# Altium PCB Remote.PcbDoc
Units mm, origin at the board's own origin, x right, y up, seen from the top; angles counter-clockwise.
Board outline 120 x 80 mm, 2 copper layers (TL, BL), stack 0.872 mm thick; 54 components, 45 nets, 207 pads, 348 vias.
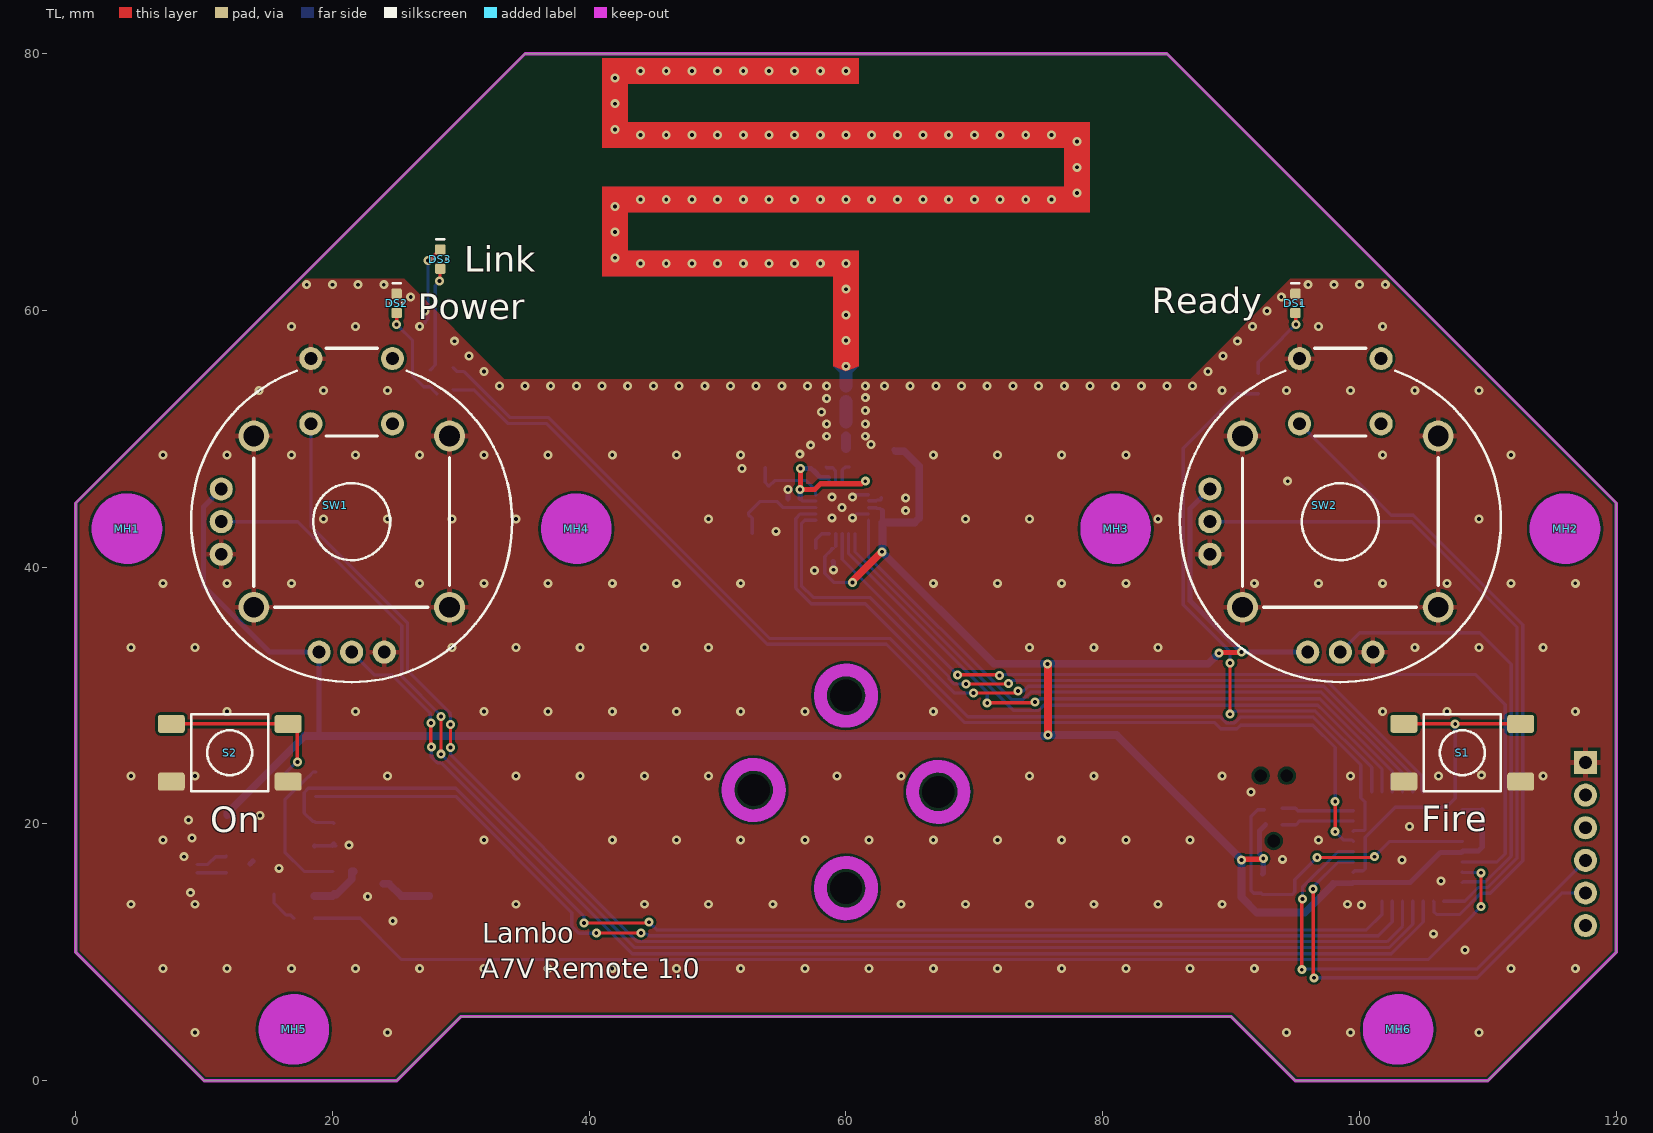
[diagram p0: TL view]
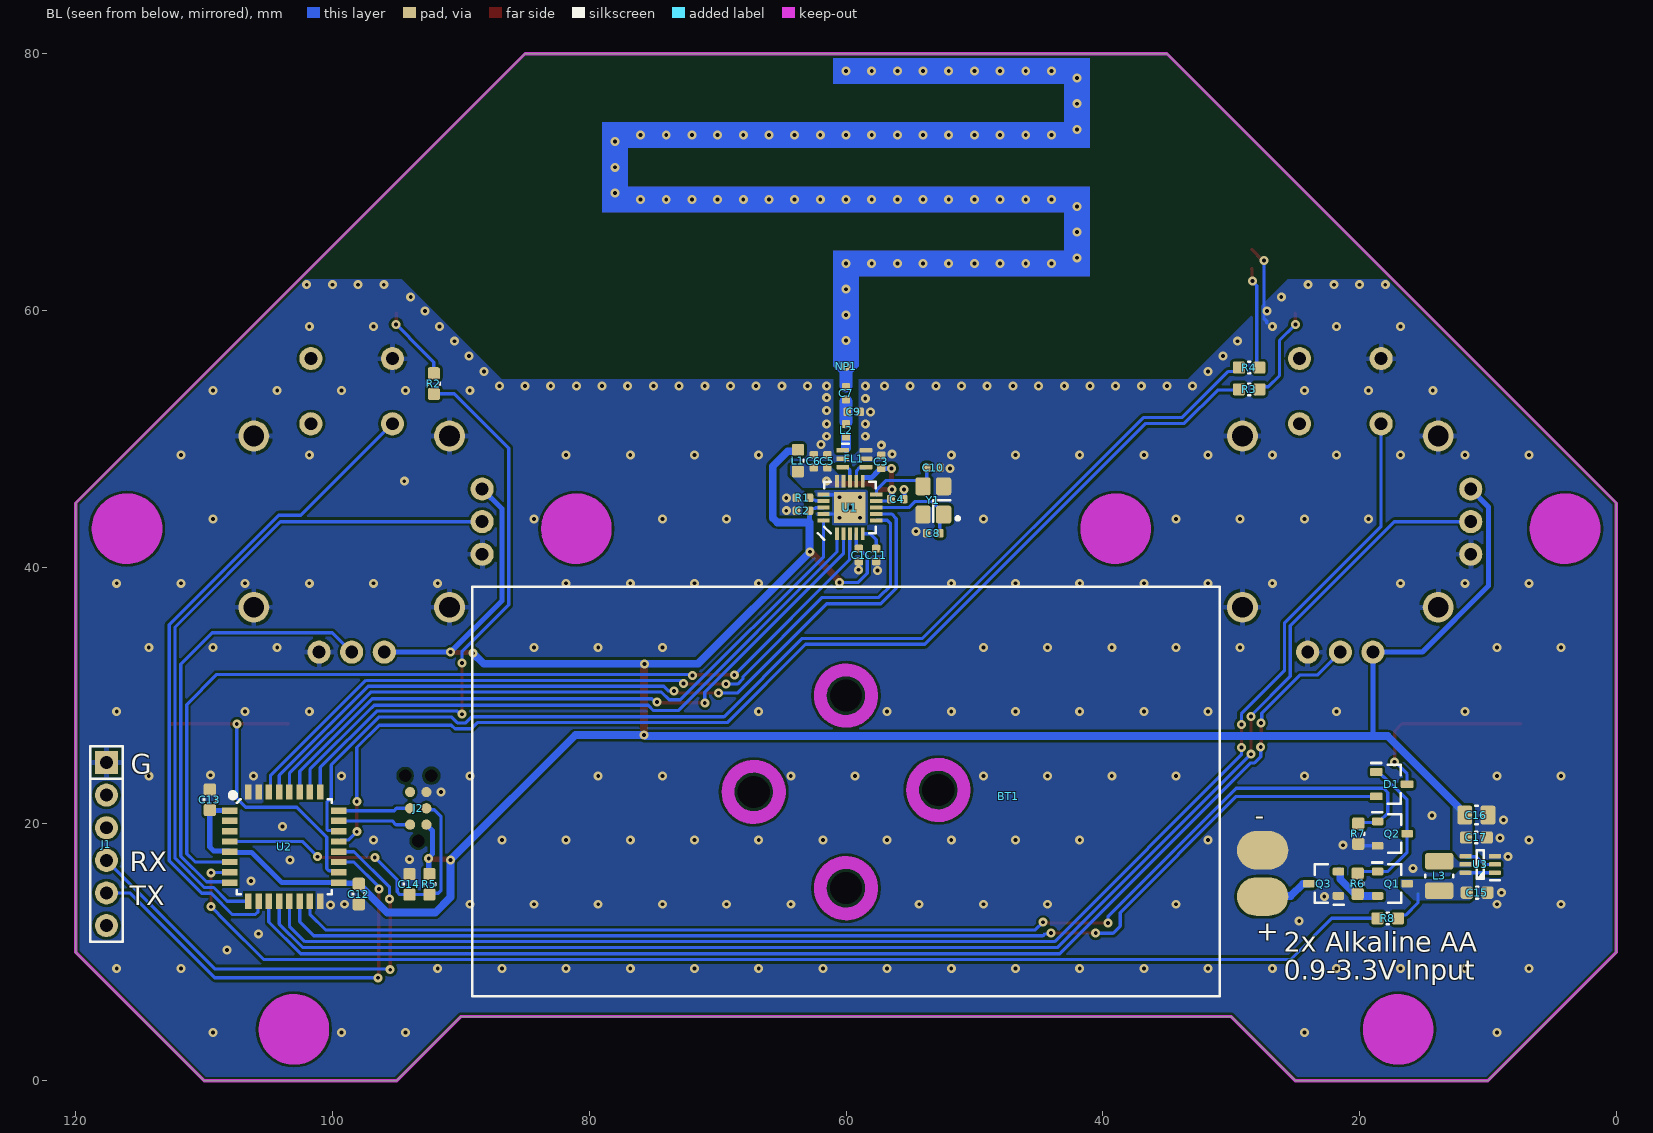
[diagram p1: BL view, seen from below]
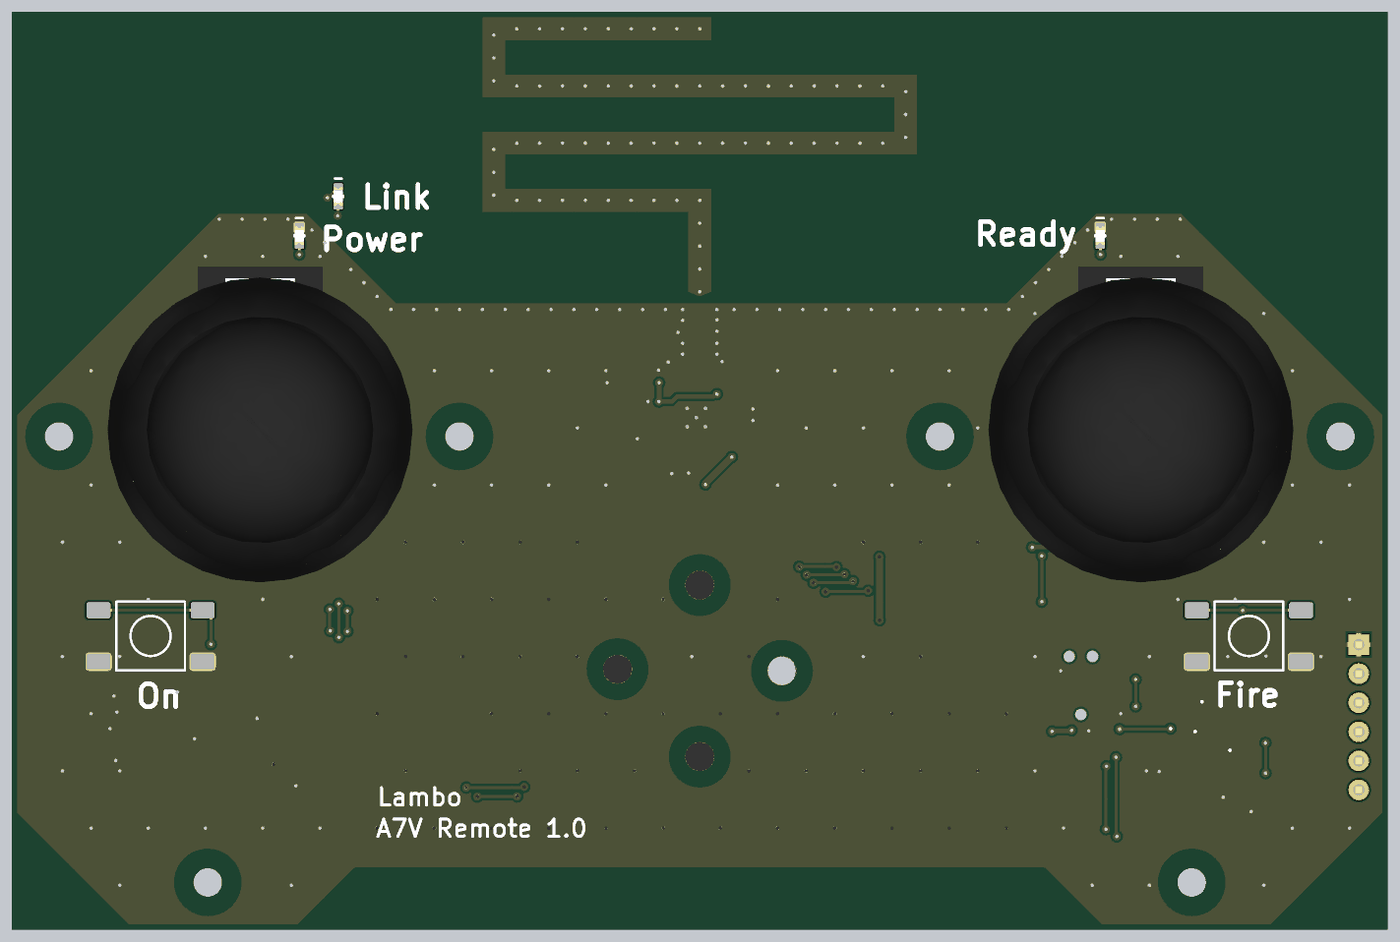
[diagram p2: 3D render of the assembled board from above, using the file's embedded part models]
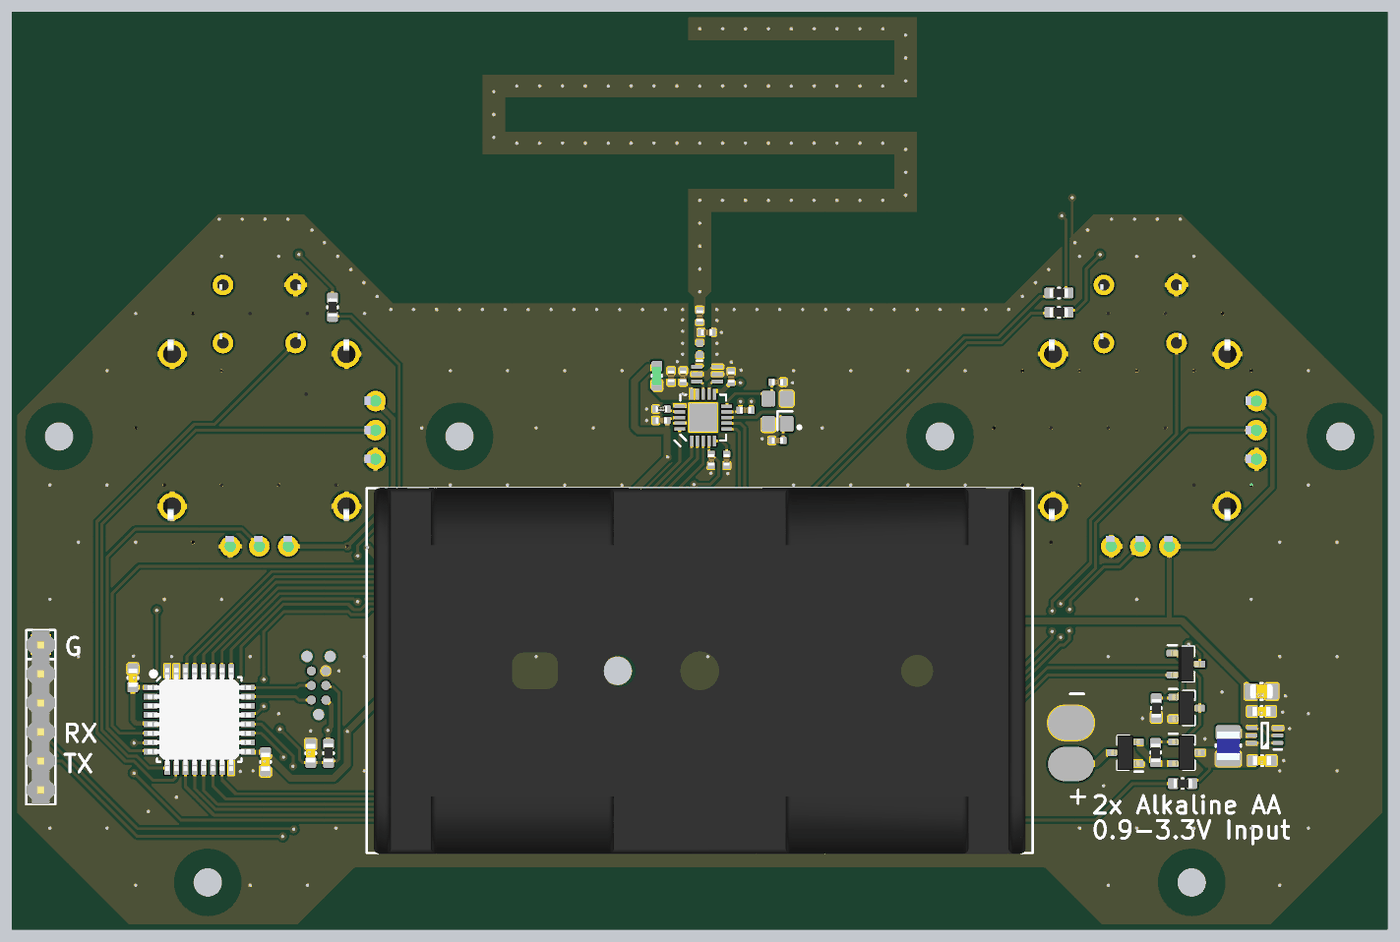
[diagram p3: 3D render of the assembled board from below, using the file's embedded part models]

## Layer stack, top to bottom
Top Solder: solder mask 0.01, Solder Resist, Dk 3.5
TL: signal copper 0.036
Dielectric 4: prepreg 0.8, FR-4, Dk 4.2
BL: signal copper 0.036
Bottom Solder: solder mask 0.01, Solder Resist, Dk 3.5

## Board outline
0,10 10,0 25,0 30,5 90,5 95,0 110,0 120,10 120,45 85,80 35,80 0,45

## Design rules (kind name [scope] priority, off if disabled: settings)
Clearance [All] p1: gap=0.2 ignorepadtopadclearanceinfootprint=TRUE except(0: Arc-Hole Track-Hole SMDPad-Hole THPad-Hole Via-Hole Fill-Hole Poly-Hole Region-Hole Text-Hole)
DiffPairsRouting DiffPairsRouting_1 [InDifferentialPair('D')] p1: maxlimit=0.4 minlimit=0.2 mostfreqgap=0.2 toplayer_minwidth=0.2 toplayer_maxwidth=0.4 toplayer_prefwidth=0.4 bottomlayer_minwidth=0.2 bottomlayer_maxwidth=0.4 bottomlayer_prefwidth=0.4 maxuncoupledlength=12.7
DiffPairsRouting [All] p2: maxlimit=0.254 minlimit=0.254 mostfreqgap=0.254 toplayer_minwidth=0.381 toplayer_maxwidth=0.381 toplayer_prefwidth=0.381 bottomlayer_minwidth=0.381 bottomlayer_maxwidth=0.381 bottomlayer_prefwidth=0.381 maxuncoupledlength=12.7
Height [All] p1: minheight=0 maxheight=150 prefheight=12.7
HoleSize [All] p1: absolutevalues=TRUE maxlimit=10 minlimit=0.3 maxpercent=80.000 minpercent=20.000
MinimumSolderMaskSliver MinimumSolderMaskSliver_1 [HasFootprint('TSQFP50P900X900X160-48N_48LQFP')] p1: minsoldermaskwidth=0.08
MinimumSolderMaskSliver [All] p2: minsoldermaskwidth=0.05
PolygonConnect [All] p1: thpad.connectstyle=Relief thpad.reliefconductorwidth=0.4 thpad.reliefentries=4 thpad.polygonreliefangle="90 Angle" thpad.airgapwidth=0.254 smdpad.connectstyle=Direct smdpad.reliefconductorwidth=0.254 smdpad.reliefentries=4 smdpad.polygonreliefangle="90 Angle" smdpad.airgapwidth=0.254 via.connectstyle=Direct via.reliefconductorwidth=0.254 via.reliefentries=4 via.polygonreliefangle="90 Angle" via.airgapwidth=0.254
RoutingVias [All] p1: holewidth=0.3 width=0.7 viastyle="Through Hole" minholewidth=0.3 minwidth=0.5 maxholewidth=1 maxwidth=2
SilkToSilkClearance [All] p1: silktosilkclearance=0
SilkToSolderMaskClearance [IsPad] p1: minsilkscreentomaskgap=0.1 clearancetoexposedcopper=TRUE
SolderMaskExpansion [All] p1: expansion=0.102 istentingtop=FALSE
Width [All] p1: maxlimit=10 minlimit=0.2 preferedwidth=0.254
24 further rules are at their usual default settings.

## Classes and differential pairs
component class Top: MH1 MH2 MH3 MH4 MH5 MH6
component class Radio: C1 C2 C3 C4 C5 C6 C7 C8 C9 C10 C11 FL1 L1 L2 NP1 R1 U1 Y1
component class Power: BT1 C15 C16 C17 D1 L3 Q1 Q2 Q3 R6 R7 R8 S2 U3
component class MCU: C12 C13 C14 DS1 DS2 DS3 J1 J2 R2 R3 R4 R5 U2
component class Interface: S1 SW1 SW2

## Components (designator, comment, footprint, x,y, rotation, side; value= is the part's Value field where it differs from the comment)
BT1 "BatteryHolder2xAA" BATTERY_HOLDER_2AA 60,22.5 r180 bottom
C1 "100nF,50V" CAPC1005X05N_0402 58.999,40.95 r90 bottom
C2 "100nF,50V" CAPC1005X05N_0402 63.35,44.4 r180 bottom
C3 "100nF,50V" CAPC1005X05N_0402 57.249,48.2 r270 bottom
C4 "100nF,50V" CAPC1005X05N_0402 56,45.3 r0 bottom
C5 "100nF,50V" CAPC1005X05N_0402 61.45,48.25 r270 bottom
C6 "100nF,50V" CAPC1005X05N_0402 62.5,48.25 r270 bottom
C7 "100pF,50V" CAPC1005X05N_0402 59.999,53.55 r90 bottom
C8 "12pF,50V" CAPC1005X05N_0402 53.2,42.65 r180 bottom
C9 "1p8F, 50V" CAPC1005X05N_0402 59.399,52.1 r0 bottom
C10 "12pF,50V" CAPC1005X05N_0402 53.2,47.75 r0 bottom
C11 "100nF,50V" CAPC1005X05N_0402 57.65,40.95 r90 bottom
C12 "100nF,50V" CAPC1608X09N_0603 97.95,14.54 r90 bottom
C13 "100nF,50V" CAPC1608X09N_0603 109.55,21.89 r270 bottom
C14 "100nF,50V" CAPC1608X09N_0603 94,15.3 r90 bottom
C15 "100nF,50V" CAPC1608X09N_0603 10.85,14.65 r0 bottom
C16 "10uF,16V" CAPC2012X12N_0805 10.9,20.7 r0 bottom
C17 "100nF,50V" CAPC1608X09N_0603 10.9,18.95 r0 bottom
D1 "BAT54C" SOT95P237X111-3N_SOT23 17.5,23.1 r180 bottom
DS1 "GRN-0603" LED_SML-LX0603 95,60.55 r270 top
DS2 "GRN-0603" LED_SML-LX0603 25,60.55 r270 top
DS3 "GRN-0603" LED_SML-LX0603 28.4,64 r270 top
FL1 "0915BM15A0001E" FLTR65P200X125-6N_0805 59.349,48.45 r180 bottom
J1 "FTDI SIP6" HIROSE_A2-6PA-2.54DSA 117.6,18.44 r180 bottom
J2 "TC2030-NL" TAGCON_TC2030-IDC-NL 93.315,21.22 r90 bottom
L1 "600R" INDC1608X10N_0603 63.75,48.3 r270 bottom
L2 "4n7H,300mA" INDC1005X04N_0402 59.999,50.65 r90 bottom
L3 "4u7H, 1.1A" INDC2520X12N_1008 13.8,15.95 r90 bottom
MH1 "2.5mm Non-Plated Hole" MTG250X550 4,43 r0 top
MH2 "2.5mm Non-Plated Hole" MTG250X550 116,43 r0 top
MH3 "2.5mm Non-Plated Hole" MTG250X550 81,43 r0 top
MH4 "2.5mm Non-Plated Hole" MTG250X550 39,43 r0 top
MH5 "2.5mm Non-Plated Hole" MTG250X550 17,4 r0 top
MH6 "2.5mm Non-Plated Hole" MTG250X550 103,4 r0 top
NP1 "PCB_ANT_915" ANT_PCB_915 60,55.65 r180 bottom
Q1 "FDN352AP" SOT95P230X110-3N_SOT23 17.45,15.35 r180 bottom
Q2 "FDN335N" SOT95P230X110-3N_SOT23 17.45,19.25 r180 bottom
Q3 "FDN352AP" SOT95P230X110-3N_SOT23 22.8,15.35 r0 bottom
R1 "56K,1%" RESC1005X04N_0402 63.35,45.4 r180 bottom
R2 "470R,1%" RESC1608X06N_0603 92.1,54.3 r270 bottom
R3 "470R,1%" RESC1608X06N_0603 28.6,53.85 r0 bottom
R4 "470R,1%" RESC1608X06N_0603 28.6,55.55 r0 bottom
R5 "10K,1%" RESC1608X06N_0603 92.45,15.3 r90 bottom
R6 "1M,1%" RESC1608X06N_0603 20.15,15.35 r270 bottom
R7 "1M,1%" RESC1608X06N_0603 20.1,19.25 r270 bottom
R8 "100K,1%" RESC1608X06N_0603 17.8,12.65 r180 bottom
S1 "TL3301AF160QG" SW_TL3301AFXXXXG 108,25.55 r180 top
S2 "TL3301AF160QG" SW_TL3301AFXXXXG 12,25.55 r180 top
SW1 "Joystick" Joystick 21.5,43.55 r0 top
SW2 "Joystick" Joystick 98.5,43.55 r0 top
U1 "CC1101" QFN50P400X400X75-20N_20QFN 59.699,44.65 r90 bottom
U2 "STM32L051K8T6" LQFP32 103.75,18.24 r180 bottom
U3 "TPS61221" TSOP65P210X100-6N_SC70 10.6,16.85 r0 bottom
Y1 "26.000MHZ,8pF" XTAL_NX3225SA 53.2,45.2 r90 bottom

## Footprints (in the part's own frame and the unit in brackets; to place one, negate y for a bottom-side part, rotate by r counter-clockwise, add the part's x,y. Pads: shape width x height; smd on the part's side, far side on the other; paste and mask are expansions set on the pad)
ANT_PCB_915 [mm]
  round 0.7 hole 0.3 mask+0.102: 1(0,0)
  TL region: 0,-1 1,0 1,7 19,7 19,14 -17,14 -17,17 19,17 19,24 -1,24 -1,22 17,22 17,19 -19,19 -19,12 17,12 17,9 -1,9 -1,0
  BL region: 0,-0.4 1,0 1,7 19,7 19,14 -17,14 -17,17 19,17 19,24 -1,24 -1,22 17,22 17,19 -19,19 -19,12 17,12 17,9 -1,9 -1,0
BATTERY_HOLDER_2AA [mm]
  oval 4x3 smd: 1(32.45,-8.15) 2(32.45,-4.55)
  round 2 hole 2.5: 3(0,7.5) 4(0,-7.5) 5(-7.188,0) 6(7.188,0.147)
  Keep-Out Layer circle w1: c7.188,0.147 r2
  Keep-Out Layer circle w1: c0,-7.5 r2
  Keep-Out Layer circle w1: c-7.188,0 r2
  Keep-Out Layer circle w1: c0,7.5 r2
  silkscreen extent -29.1,-15.92 29.1,15.98, body extent -28.5,-16 28.5,16, height 15.2
CAPC1005X05N_0402 [mm] "Chip Capacitor, 2-Leads, Body 1.0x0.5mm, IPC Medium Density"
  rrect33% 0.6x0.65 smd: 1(-0.5,0) 2(0.5,0)
  body extent -0.5,-0.28 0.5,0.27, height 0.5
CAPC1608X09N_0603 [mm] "Chip Capacitor, 2-Leads, Body 1.6x0.8mm, IPC Medium Density"
  rrect32% 0.95x0.95 smd: 1(-0.8,0) 2(0.8,0)
  silkscreen extent -0.08,-0.45 0.08,0.45, body extent -0.8,-0.4 0.8,0.4, height 0.3
CAPC2012X12N_0805 [mm] "Chip Capacitor, 2-Leads, Body 2.0x1.2mm, IPC Medium Density"
  rrect26% 1.15x1.45 smd: 1(-0.9,0) 2(0.9,0)
  silkscreen extent -0.1,-0.72 0.1,0.72, body extent -1,-0.62 1,0.63, height 0.78
FLTR65P200X125-6N_0805 [mm] "0805 balun, 6-Pins, Body 1.25x2mm, Pitch 0.65mm"
  rrect33% 1x0.35 smd: 1(-0.9,0.65) 2(-0.9,0) 3(-0.9,-0.65) 4(0.9,-0.65) 5(0.9,0) 6(0.9,0.65)
  silkscreen extent -0.92,1.17 -0.43,1.17, body extent -0.63,-1 0.63,1, height 0.7
HIROSE_A2-6PA-2.54DSA [mm] "HEADER 0.1\" x6"
  rect 1.8x1.8 hole 1: 1(0,6.35)
  round 1.8 hole 1: 2(0,3.81) 3(0,1.27) 4(0,-1.27) 5(0,-3.81) 6(0,-6.35)
  silkscreen extent -1.27,-7.62 1.27,7.62, body extent -1.27,-7.62 1.27,7.62, height 8.54
INDC1005X04N_0402 [mm] "Chip Inductor, 2-Leads, Body 1.0x0.5mm, IPC Medium Density"
  rrect33% 0.6x0.65 smd: 1(-0.5,0) 2(0.5,0)
  body extent -0.53,-0.28 0.53,0.28, height 0.4
INDC1608X10N_0603 [mm] "Chip Inductor, 2-Leads, Body 1.6x0.8mm, IPC Medium Density"
  rrect25% 0.9x0.95 smd: 1(-0.85,0) 2(0.85,0)
  silkscreen extent -0.1,-0.45 0.1,0.45, body extent -0.8,-0.4 0.8,0.4, height 1
INDC2520X12N_1008 [mm] "Chip Inductor, 2-Leads, Body 2.5x2.0mm, IPC Medium Density"
  rrect31% 1.3x2.2 smd: 1(-1.15,0) 2(1.15,0)
  silkscreen extent -0.1,-1.1 0.1,1.1, body extent -1.25,-1 1.25,1, height 1
Joystick [mm]
  round 2.4 hole 1.6: M1(-7.62,6.668) M2(7.62,6.668) M3(7.62,-6.668) M4(-7.62,-6.667)
  round 1.8 hole 1: S1(-3.175,12.7) S2(3.175,12.7) S3(3.175,7.62) S4(-3.175,7.62) X1(-2.54,-10.16) X2(0,-10.16) X3(2.54,-10.16) Y1(-10.16,2.54) Y2(-10.16,0) Y3(-10.16,-2.54)
  silkscreen extent -12.5,-12.5 12.5,13.5, body extent -13.27,-13.31 13.4,14.31, height 30.23
LED_SML-LX0603 [mm] "Chip led, 2-Leads, Body 1.6x0.8mm, IPC Medium Density"
  rrect25% 0.8x0.8 smd: 1(-0.75,0) 2(0.75,0)
  silkscreen extent -1.55,-0.45 0.05,0.45, body extent -0.8,-0.4 0.8,0.4, height 0.63
LQFP32 [mm] "Low Profile Quad Flat Pack"
  rect 1.2x0.5 smd: 1(-4.25,2.8) 2(-4.25,2) 3(-4.25,1.2) 4(-4.25,0.4) 5(-4.25,-0.4) 6(-4.25,-1.2) 7(-4.25,-2) 8(-4.25,-2.8) 17(4.25,-2.8) 18(4.25,-2) 19(4.25,-1.2) 20(4.25,-0.4) 21(4.25,0.4) 22(4.25,1.2) 23(4.25,2) 24(4.25,2.8)
  rect 0.5x1.2 smd: 9(-2.8,-4.25) 10(-2,-4.25) 11(-1.2,-4.25) 12(-0.4,-4.25) 13(0.4,-4.25) 14(1.2,-4.25) 15(2,-4.25) 16(2.8,-4.25) 25(2.8,4.25) 26(2,4.25) 27(1.2,4.25) 28(0.4,4.25) 29(-0.4,4.25) 30(-1.2,4.25) 31(-2,4.25) 32(-2.8,4.25)
  silkscreen extent -4.2,-3.7 3.7,4.2, body extent -4.5,-4.5 4.5,4.5, height 1.63
MTG250X550 [mm]
  round 0 hole 2.5 unplated: ""(0,0)
  TL keep-out circle w2.75: c0,0 r1.375
  BL keep-out circle w2.75: c0,0 r1.375
QFN50P400X400X75-20N_20QFN [mm] "QFN, 20-Leads, Body 4.0x4.0mm (max), Pitch 0.50mm"
  rect 0.95x0.3 smd mask+0.12: 1(-2.05,1) 2(-2.05,0.5) 3(-2.05,0) 4(-2.05,-0.5) 5(-2.05,-1) 11(2.05,-1) 12(2.05,-0.5) 13(2.05,0) 14(2.05,0.5) 15(2.05,1)
  rect 0.3x0.95 smd mask+0.12: 6(-1,-2.05) 7(-0.5,-2.05) 8(0,-2.05) 9(0.5,-2.05) 10(1,-2.05) 16(1,2.05) 17(0.5,2.05) 18(0,2.05) 19(-0.5,2.05) 20(-1,2.05)
  rect 2.45x2.45 smd: 21(0,0)
  silkscreen extent -2.5,-2 2,2.5, body extent -2,-2 2,2, height 0.75
RESC1005X04N_0402 [mm] "Chip Resistor, 2-Leads, Body 1.0x0.5mm, IPC Medium Density"
  rrect33% 0.6x0.65 smd: 1(-0.5,0) 2(0.5,0)
  body extent -0.5,-0.25 0.5,0.25, height 0.35
RESC1608X06N_0603 [mm] "Chip Resistor, 2-Leads, Body 1.6x0.8mm, IPC Medium Density"
  rrect32% 0.95x0.95 smd: 1(-0.8,0) 2(0.8,0)
  silkscreen extent -0.08,-0.45 0.08,0.45, body extent -0.78,-0.4 0.82,0.4, height 0.4
SOT95P230X110-3N_SOT23 [mm] "SOT23, 3-Leads, Body 3.0x2.5mm (max), Pitch 0.95mm, IPC Medium Density"
  rrect33% 0.9x0.6 smd: 1(-1.15,0.95) 2(-1.15,-0.95) 3(1.15,0)
  silkscreen extent -1.55,-1.5 0.7,1.65, body extent -1.25,-1.5 1.25,1.5, height 1.1
SOT95P237X111-3N_SOT23 [mm] "SOT23, 3-Leads, Body 3.0x2.6mm (max), Pitch 0.95mm, IPC Medium Density"
  rrect33% 1x0.6 smd: 1(-1.2,0.95) 2(-1.2,-0.95) 3(1.2,0)
  silkscreen extent -1.6,-1.52 0.7,1.65, body extent -1.32,-1.52 1.32,1.52, height 1.11
SW_TL3301AFXXXXG [mm] "SWITCH TACT H=5.0MM SMT"
  rrect29% 2.1x1.4 smd: 1(-4.55,2.25) 2(4.55,2.25) 3(-4.55,-2.25) 4(4.55,-2.25)
  silkscreen extent -3,-3 3,3, body extent -3,-3 3,3, height 5
TAGCON_TC2030-IDC-NL [mm]
  round 0.8 smd: 1(-1.27,-0.635) 2(-1.27,0.635) 3(0,-0.635) 4(0,0.635) 5(1.27,-0.635) 6(1.27,0.635)
  round 0.8 hole 1: ""(-2.54,0)
  round 0 hole 1: ""(2.54,-1.016) ""(2.54,1.016)
TSOP65P210X100-6N_SC70 [mm] "TSOP, 6-Leads, Body 2.2x1.4mm (max), Pitch 0.65mm, IPC Medium Density"
  rrect29% 0.925x0.35 smd: 1(-1.138,0.65) 2(-1.138,0) 3(-1.138,-0.65) 4(1.138,-0.65) 5(1.138,0) 6(1.138,0.65)
  silkscreen extent -1.5,-1.1 0.32,1.22, body extent -0.67,-1.1 0.67,1.1, height 1
XTAL_NX3225SA [mm]
  rrect33% 1.4x1.2 smd: 1(-1.1,-0.8) 2(1.1,-0.8) 3(1.1,0.8) 4(-1.1,0.8)
  silkscreen extent -1.65,-2.03 0,0, body extent -1.65,-1.3 1.65,1.3, height 0.6

## Part data
C1 C2 C3 C4 C5 C6 C11: library part CCG-104DE-H, "CAP CER 0.1UF 50V X7R 0402", Capacitance=100nF, Dielectric=X7R, Manufacturer="Taiyo Yuden", Manufacturer Part Number=UMK105B7104KV-FR, Supplier Part Number 1=587-3498-1-ND, Tolerance=10%, Voltage=50V, BWA PN=CCG-104DE-H, Display_Name=100nF,50V, Schematic Symbol=CAP-NP_1, Supplier 1=Digi-Key, Type=Ceramic
C7: library part CCG-101PAH-F, "CAP CER 100PF 50V 5% NP0 0402", Capacitance=100pF, Dielectric=NPO, Manufacturer="Murata Electronics North America", Manufacturer Part Number=GRM1555C1H101JA01D, Supplier Part Number 1=490-5922-1-ND, Tolerance=5%, Voltage=50V, BWA PN=CCG-101PAH-F, Display_Name=100pF,50V, Schematic Symbol=CAP-NP_1, Supplier 1=Digi-Key, Type=Ceramic
C8 C10: library part CCG-12PAH-F, "CAP CER 12PF 50V 5% NP0 0402", Capacitance=12pF, Dielectric=NPO, Manufacturer="Murata Electronics North America", Manufacturer Part Number=GRM1555C1H120JA01D, Supplier Part Number 1=490-5924-1-ND, Tolerance=5%, Voltage=50V, BWA PN=CCG-12PAH-F, Display_Name=12pF,50V, Schematic Symbol=CAP-NP_1, Supplier 1=Digi-Key, Type=Ceramic
C9: library part CCG-1P8AH-F, "CAP CER 1.8PF 50V C0G/NP0 0402", Capacitance=1p8F, Dielectric=Ceramic, Manufacturer="Murata Electronics North America", Manufacturer Part Number=GJM1555C1H1R8BB01D, Supplier Part Number 1=490-8089-1-ND, Tolerance=±0.1pF, Voltage=50V, BWA PN=CCG-1P8AH-F, Display_Name="1p8F, 50V", Schematic Symbol=CAP-NP_1, Supplier 1=Digi-Key, Type=C0G/NP0
C12 C13 C14 C15 C17: library part CCH-104CH-G, "CAP CER 0.1UF 50V 10% X7R 0603", Capacitance=100nF, Dielectric=X7R, Manufacturer=Kemet, Manufacturer Part Number=C0603C104K5RACTU, Supplier Part Number 1=399-5089-1-ND, Tolerance=10%, Voltage=50V, BWA PN=CCH-104CH-G, Display_Name=100nF,50V, Schematic Symbol=CAP-NP_1, Supplier 1=Digi-Key, Type=Ceramic
C16: library part CCI-106CD-G, "CAP CER 10µF ±10% 16V X7R 0805", Capacitance=10uF, Dielectric=X7R, Manufacturer="Samsung Electro-Mechanics America, Inc.", Manufacturer Part Number=CL21B106KOQNNNG, Supplier Part Number 1=1276-6472-1-ND, Tolerance=10%, Voltage=16V, BWA PN=CCI-106CD-G, Display_Name=10uF,16V, Schematic Symbol=CAP-NP_1, Supplier 1=Digi-Key, Type=Ceramic
D1: library part DIO-10192-A, "DIODE ARRAY SCHOTTKY 30V SOT23-3", Manufacturer="Fairchild/ON Semiconductor", Supplier Part Number 1=BAT54CFSCT-ND, BWA PN=DIO-10192-A, d_if(max)=200mA, Display_Name=BAT54C, Manufacturer Part Number=BAT54C, Schematic Symbol=BAT54C, Supplier 1=Digi-Key, Type=Schottky, Vf@I="800mV @ 100mA", Vr(max)=30V
DS1 DS2 DS3: library part LED-10087-A, "LED GREEN CLEAR 0603 SMD", Colour=GREEN, Manufacturer=Dialight, Manufacturer Part Number=5988081107F, Supplier Part Number 1=350-2036-1-ND, Axial Intensity=300mcd, BWA PN=LED-10087-A, Display_Name=GRN-0603, If(max)=20mA, Lens Style/Size=0603, Lens type=clear, Schematic Symbol=LED_1, Supplier 1=Digi-Key, Vf@I=3.2V, Viewing Angle=140, Vr(max)=-, Wavelength=523nm
FL1: library part ICT-10614-A, "BALUN 902MHZ-928MHZ 0805", Manufacturer="Johanson Technology Inc", Supplier Part Number 1=712-1541-1-ND, BWA PN=ICT-10614-A, Display_Name=0915BM15A0001E, Manufacturer Part Number=0915BM15A0001E, Schematic Symbol=____BM15A0001E, Supplier 1=Digi-Key
J1: library part CON-10749-A, "FTDI Serial Header", Manufacturer="Hirose Electric Co Ltd", Manufacturer Part Number=A2-6PA-2.54DSA(71), Supplier Part Number 1=H123043-ND, BWA PN=CON-10749-A, Contacts=6, Display_Name="FTDI SIP6", Pitch=2.54mm, Rows=1, Schematic Symbol=FTDI_TTL_232R, Supplier 1=Digi-Key, Type=Header
J2: library part NONPART-056, "Tag connect 6 way - No Legs", BWA PN=NONPART-056, Display_Name=TC2030-NL, Schematic Symbol=TAGCON_TC2030-IDC
L1: library part IND-10163-A, "FERRITE BEAD 600 OHM 0603 1LN", Current Rating=1A, DC Resistance=200mOhm, Inductance="600Ohm @ 100MHz", Manufacturer="Wurth Electronics Inc", Manufacturer Part Number=742792651, Supplier Part Number 1=732-1593-1-ND, BWA PN=IND-10163-A, Display_Name=600R, Schematic Symbol=INDUCTOR_1, Supplier 1=Digi-Key
L2: library part IND-10145-A, "INDUCTOR 4.7NH 300MA 0402", Current Rating=300mA, DC Resistance=180mOhm, Inductance=4n7H, Manufacturer="Murata Electronics North America", Manufacturer Part Number=LQG15HS4N7S02D, Supplier Part Number 1=490-2618-1-ND, BWA PN=IND-10145-A, Display_Name=4n7H,300mA, Schematic Symbol=INDUCTOR_1, Sheilding=Unshielded, Supplier 1=Digi-Key, Type=Air
L3: library part IND-10165-A, "INDUCTOR POWER 4.7UH 1.1A SMD", Current Rating=1.1A, DC Resistance=276mOhm, Inductance=4u7H, Manufacturer="Murata Electronics North America", Manufacturer Part Number=DFE252010R-H-4R7M=P2, Supplier Part Number 1=490-10646-1-ND, BWA PN=IND-10165-A, Display_Name="4u7H, 1.1A", Schematic Symbol=INDUCTOR_1, Sheilding=Unsheilded, Supplier 1=Digi-Key, Type=Wirewound
MH1 MH2 MH3 MH4 MH5 MH6: library part NONPART-007, BWA PN=NONPART-007, Display_Name="2.5mm Non-Plated Hole", Schematic Symbol=HOLE_UNPLATED
Q1 Q3: library part TRN-10006-A, "MOSFET P-CH 30V 1.3A SSOT-3", Manufacturer=Fairchild, Supplier Part Number 1=FDN352APCT-ND, BWA PN=TRN-10006-A, Display_Name=FDN352AP, Id(max)=-1.3A, Manufacturer Part Number=FDN352AP, rds(on)=180mOhms, Schematic Symbol=MOSFET-P_1, Supplier 1=Digi-Key, Type=P, Vds(max)=-30V, Vgs(max)=+/-25V, Vth(max)=-2.5V
Q2: library part TRN-10045-A, "MOSFET N-CH 20V 1.7A SSOT3", Manufacturer="Fairchild Semiconductor", Supplier Part Number 1=FDN335NCT-ND, BWA PN=TRN-10045-A, Display_Name=FDN335N, Id(max)=1.7A, Manufacturer Part Number=FDN335N, rds(on)=70mOhm, Schematic Symbol=MOSFET-N_1, Supplier 1=Digi-Key, Type=N, Vds(max)=20V, Vgs(max)=+/-8V, Vth(max)=1.5V
R1: library part RSG-56K00-D, "RES 56.0K OHM 1/16W 1% 0402 SMD", Manufacturer=Yageo, Manufacturer Part Number=RC0402FR-0756KL, Power=0.063W, Resistance=56K, Supplier Part Number 1=311-56.0KLRCT-ND, Tolerance=1%, BWA PN=RSG-56K00-D, Display_Name=56K,1%, Schematic Symbol=RESISTOR_1, Supplier 1=Digi-Key, Type=Chip
R2 R3 R4: library part RSH-470R0-D, "RES 470 OHM 1/10W 1% 0603 SMD", Manufacturer="Rohm Semiconductor", Manufacturer Part Number=MCR03EZPFX4700, Power=0.1W, Resistance=470R, Supplier Part Number 1=RHM470HCT-ND, Tolerance=1%, BWA PN=RSH-470R0-D, Display_Name=470R,1%, Schematic Symbol=RESISTOR_1, Supplier 1=Digi-Key, Type=Chip
R5: library part RSH-10K00-D, "RES 10.0K OHM 1/10W 1% 0603 SMD", Manufacturer=Yageo, Manufacturer Part Number=RC0603FR-0710KL, Power=0.1W, Resistance=10K, Supplier Part Number 1=311-10.0KHRCT-ND, Tolerance=1%, BWA PN=RSH-10K00-D, Display_Name=10K,1%, Schematic Symbol=RESISTOR_1, Supplier 1=Digi-Key, Type=Chip
R6 R7: library part RSH-1M000-D, "RES 1.00M OHM 1/10W 1% 0603 SMD", Manufacturer=Yageo, Manufacturer Part Number=RC0603FR-071ML, Power=0.1W, Resistance=1M, Supplier Part Number 1=311-1.00MHRCT-ND, Tolerance=1%, BWA PN=RSH-1M000-D, Display_Name=1M,1%, Schematic Symbol=RESISTOR_1, Supplier 1=Digi-Key, Type=Chip
R8: library part RSH-100K0-D, "RES 100K OHM 1/10W 1% 0603 SMD", Manufacturer=Yageo, Manufacturer Part Number=RC0603FR-07100KL, Power=0.1W, Resistance=100K, Supplier Part Number 1=311-100KHRCT-ND, Tolerance=1%, BWA PN=RSH-100K0-D, Display_Name=100K,1%, Schematic Symbol=RESISTOR_1, Supplier 1=Digi-Key, Type=Chip
S1 S2: library part SWT-10009-A, "SWITCH TACT 160GF H=5.0MM SMT", Manufacturer=E-Switch, Supplier Part Number 1=EG2526CT-ND, BWA PN=SWT-10009-A, Circuit=SPST-NO, Display_Name=TL3301AF160QG, Function=Off-Mom, Manufacturer Part Number=TL3301AF160QG, Schematic Symbol=SW_SPST_2, Supplier 1=Digi-Key, Type=Tactile
U1: library part ICT-10885-A, "IC RF TXRX ISM<1GHZ 20VFQFN", Manufacturer="Texas Instruments", Manufacturer Part Number=CC1101RGPR, Supplier Part Number 1=296-35718-1-ND, Temp Range="-40°C ~ 85°C", BWA PN=ICT-10885-A, Display_Name=CC1101, Schematic Symbol=CC1101, Supplier 1=Digi-Key
U2: library part ICT-10696-A, "32 Bit Mcirocontroler", Manufacturer="ST Microelectronics", Supplier Part Number 1=497-14901-ND, Temp Range="-40°C ~ 85°C", BWA PN=ICT-10696-A, Display_Name=STM32L051K8T6, Manufacturer Part Number=STM32L051K8T6, Schematic Symbol=STM32L051x6/8, Supplier 1=Digi-Key
U3: library part ICT-10893-A, "IC REG BOOST 3.3V 200MA SC70-6", Manufacturer="Texas Instruments", Manufacturer Part Number=TPS61221DCKT, Supplier Part Number 1=296-24171-1-ND, Temp Range="-40°C ~ 125°C (TJ)", BWA PN=ICT-10893-A, Display_Name=TPS61221, Schematic Symbol=TPS61221, Supplier 1=Digi-Key
Y1: library part XTL-10058-A, "CRYSTAL 26MHZ 8PF SMD", Frequency=26MHz, Load Capacitance=8pF, Manufacturer=NDK, Manufacturer Part Number=NX3225SA-26.000000MHZ-STD-CSR-1, Supplier Part Number 1=644-1054-1-ND, Accuracy=±15ppm, BWA PN=XTL-10058-A, Display_Name=26.000MHZ,8pF, Schematic Symbol=XTAL_2, Supplier 1=Digi-Key, Type=Fundamental

## Via types
v1: diameter 0.7, hole 0.3, TL to BL, tented both sides, 348 vias

## Nets (pads, with @x,y where several pads share a name; then routed paths per layer and width w, separated by ;. In a path a pad name is that pad's centre, name@x,y a point inside that pad or via, vN(x,y) a via of type N, cw(c..) or ccw(c..) an arc to the next point about the centre after c; other vN are vias at no path point)
3V3: C1.2 C2.2 C12.2 C13.2 C16.2 C17.2 J2.1 L1.1 R5.2 SW1.X1 SW1.Y1 SW2.X1 SW2.Y1 U1.4 U1.18 U2.1 U2.5 U2.17 U3.2 U3.4 | length 229.5
  TL w0.4: v1(60.5,38.8) v1@60.5,38.9 ; v1(89.05,33.3) 89.095,33.345 90.755,33.345 v1(90.8,33.39) ; v1(90.8,17.2) 90.85,17.25 92.45,17.25 v1(92.5,17.299)
  TL w0.6: v1@60.5,38.9 v1(62.8,41.2) ; v1(75.7,32.471) 75.725,32.445 v1(75.725,26.925)
  BL w0.254: U3.2 10.306,16.85 10.908,17.452 11.69,17.452 U3.4 ; C1.2@58.9,41.45 58.9,41.376 58.601,41.077 58.597,41.077 58.347,40.828 58.347,39.522 59.07,38.8 v1(60.5,38.8) ; C1.2@58.9,41.45 C1.2 ; C1.2@59.199,41.625 U1.4 ; U1.18 61.772,44.627 62.36,44.627 62.42,44.568 62.682,44.568 C2.2 ; SW2.X1@95.9,33.6 95.96,33.54 SW2.X1
  BL w0.4: SW1.Y1 9.95,44.7 9.95,38.55 15.11,33.39 SW1.X1 18.96,27.182 18.96,26.9 ; v1(62.8,41.2) v1@62.849,41.249 ; 62.849,43.488 C2.2@62.849,44.399 ; L1.1 L1.1@63.879,49.021 ; SW2.Y1 86.8,44.55 86.8,37.39 v1(90.8,33.39) 95.69,33.39 SW2.X1@95.9,33.6 ; R5.2 92.5,16.15 v1(92.5,17.299) 92.5,17.381 92.2,17.681 92.2,19.47 J2.1 ; C12.2 98,15.39 99.45,15.39 U2.17 103.94,15.44 106.29,17.79 107.95,17.79 U2.5 108.05,17.89 109.24,17.89 109.55,18.2 C13.2 ; U2.1@108.025,21.065 C13.2@109.525,21.065
  BL w0.6: C16.2 11.8,20.85 12.075,21.125 17.8,26.85 75.623,26.85 75.698,26.925 81.075,26.925 v1(90.8,17.2) 90.8,14.3 92,13.1 95.737,13.1 97.95,15.313 C12.2 ; v1(62.8,41.2) 71.529,32.471 v1(75.7,32.471) 88.221,32.471 v1(89.05,33.3) ; v1@62.849,41.249 62.849,43.488 65.349,43.488 65.7,43.839 65.7,47.85 64.529,49.021 L1.1@63.879,49.021
GND: BT1.2 C1.1 C2.1 C3.1 C4.1 C5.1 C6.1 C8.1 C9.1 C10.1 C11.1 C12.1 C13.1 C14.2 C15.1 C16.1 C17.1 DS1.1 DS2.1 DS3.1 FL1.2 FL1.5 FL1.6 J1.1 J2.5 Q2.2 Q3.1 R1.1 R7.2 S1.1 S1.2 S2.1 S2.2 SW1.M1 SW1.M2 SW1.M3 SW1.M4 SW1.S1 SW1.X3 SW1.Y3 SW2.M1 SW2.M2 SW2.M3 SW2.M4 SW2.S1 SW2.X3 SW2.Y3 U1.16 U1.19 U1.21 U2.16 U2.31 U2.32 U3.3 Y1.2 Y1.4 | length 11.4
  TL w0.254: v1(27.45,63.883) 27.533,63.883 DS3.1
  BL w0.254: Q2.2 20,18.3 R7.2@20.25,18.3 ; 27.223,59.05 27.223,59.171 27.45,59.398 v1(27.45,63.883) ; v1(55.475,46.05) v1@55.488,46.038 ; C4.1@55.488,45.312 C4.1 ; U1.21@60.699,45.65 U1.16 ; U1.21@60.8,44.15 U1.19
  BL w0.4: R7.2@20,18.35 R7.2 ; C4.1@55.488,45.312 v1@55.488,46.038 ; C1.1@59.011,40.439 59.013,40.437 59.013,39.814 v1(59.027,39.8)
  other v1: 9.3,3.75 24.3,3.75 94.3,3.75 99.3,3.75 109.3,3.75 6.8,8.75 11.8,8.75 16.8,8.75 21.8,8.75 26.8,8.75 31.8,8.75 36.8,8.75 41.8,8.75 46.8,8.75 51.8,8.75 56.8,8.75 61.8,8.75 66.8,8.75 71.8,8.75 76.8,8.75 81.8,8.75 86.8,8.75 91.8,8.75 111.8,8.75 116.8,8.75 108.2,10.2 105.75,11.45 24.7,12.45 100.15,13.7 4.3,13.75 9.3,13.75 34.3,13.75 44.3,13.75 49.3,13.75 54.3,13.75 64.3,13.75 69.3,13.75 74.3,13.75 79.3,13.75 84.3,13.75 89.3,13.75 99.05,13.75 22.75,14.35 8.95,14.65 106.35,15.55 15.85,16.55 103.3,17.2 94,17.25 8.45,17.45 21.3,18.35 6.8,18.75 31.8,18.75 41.8,18.75 46.8,18.75 51.8,18.75 56.8,18.75 61.8,18.75 66.8,18.75 71.8,18.75 76.8,18.75 81.8,18.75 86.8,18.75 96.8,18.75 9.05,18.9 103.9,19.8 8.8,20.3 14.35,20.65 91.55,22.5 4.3,23.75 9.3,23.75 24.3,23.75 34.3,23.75 39.3,23.75 44.3,23.75 49.3,23.75 59.3,23.75 64.3,23.75 74.3,23.75 79.3,23.75 89.3,23.75 99.3,23.75 106.15,23.75 114.3,23.75 109.5,23.8 11.8,28.75 21.8,28.75 31.8,28.75 36.8,28.75 41.8,28.75 46.8,28.75 51.8,28.75 56.8,28.75 66.8,28.75 101.8,28.75 106.8,28.75 116.8,28.75 4.3,33.75 9.3,33.75 29.3,33.75 34.3,33.75 39.3,33.75 44.3,33.75 49.3,33.75 74.3,33.75 79.3,33.75 84.3,33.75 104.3,33.75 109.3,33.75 114.3,33.75 6.8,38.75 11.8,38.75 16.8,38.75 26.8,38.75 31.8,38.75 36.8,38.75 41.8,38.75 46.8,38.75 51.8,38.75 66.8,38.75 71.8,38.75 76.8,38.75 81.8,38.75 91.8,38.75 96.8,38.75 101.8,38.75 106.8,38.75 111.8,38.75 116.8,38.75 57.55,39.75 54.55,42.8 19.3,43.75 24.3,43.75 29.3,43.75 34.3,43.75 49.3,43.75 69.3,43.75 74.3,43.75 84.3,43.75 109.3,43.75 58.9,43.85 60.5,43.85 64.65,44.4 59.699,44.65 64.65,45.4 58.9,45.45 60.5,45.45 94.4,46.7 51.9,47.7 6.8,48.75 11.8,48.75 16.8,48.75 21.8,48.75 26.8,48.75 31.8,48.75 36.8,48.75 41.8,48.75 46.8,48.75 51.8,48.75 66.8,48.75 71.8,48.75 76.8,48.75 81.8,48.75 101.8,48.75 111.8,48.75 56.4,48.8 57.25,49.5 61.95,49.55 58.5,50.2 61.5,50.2 58.5,51.15 61.5,51.15 58.1,52.1 61.5,52.2 58.5,53.15 61.5,53.2 14.3,53.75 19.3,53.75 24.3,53.75 89.3,53.75 94.3,53.75 99.3,53.75 104.3,53.75 109.3,53.75 33,54.1 35,54.1 37,54.1 39,54.1 41,54.1 43,54.1 45,54.1 47,54.1 49,54.1 51,54.1 53,54.1 55,54.1 57,54.1 58.5,54.1 61.5,54.1 63,54.1 65,54.1 67,54.1 69,54.1 71,54.1 73,54.1 75,54.1 77,54.1 79,54.1 81,54.1 83,54.1 85,54.1 87,54.1 31.8,55.25 88.2,55.25 30.65,56.45 89.35,56.45 29.5,57.6 90.5,57.6 16.8,58.75 21.8,58.75 26.8,58.75 91.65,58.75 96.8,58.75 101.8,58.75 27.2,59.95 92.8,59.95 26.1,61.05 93.9,61.05 18,62 20,62 22,62 24,62 96,62 98,62 100,62 102,62
LINK_LED: R4.2 U2.22 | length 90
  BL w0.254: R4.2 29.713,55.237 30.256,55.237 33.839,51.654 36.838,51.654 54.042,34.45 63.4,34.45 69.496,28.354 89.139,28.354 89.62,27.873 90.267,27.873 90.736,28.342 96.358,28.342 100.1,24.6 100.1,22.027 100.427,21.701 100.427,19.589 100.329,19.491 99.551,19.491 U2.22
NetBT1_1: BT1.1 Q3.3 | length 4
  BL w0.6: Q3.3 24.4,15.35 25.35,14.4 BT1.1@27.55,14.4
NetC7_1: C7.1 C9.2 L2.2 | length 1.5
  BL w1: L2.2@59.999,51.3 C9.2@59.999,52.1 ; C9.2@59.999,52.15 C7.1@59.999,52.9
NetC7_2: C7.2 NP1.1 | length 1.6
  BL w1: C7.2@60,54.101 NP1.1 NP1.1@60,55.75
  other v1: 60,57.65 60,59.65 60,61.65 44,63.65 46,63.65 48,63.65 50,63.65 52,63.65 54,63.65 56,63.65 58,63.65 60,63.65 42,64.1 42,66.1 42,68.1 44,68.65 46,68.65 48,68.65 50,68.65 52,68.65 54,68.65 56,68.65 58,68.65 60,68.65 62,68.65 64,68.65 66,68.65 68,68.65 70,68.65 72,68.65 74,68.65 76,68.65 78,69.15 78,71.15 78,73.15 44,73.65 46,73.65 48,73.65 50,73.65 52,73.65 54,73.65 56,73.65 58,73.65 60,73.65 62,73.65 64,73.65 66,73.65 68,73.65 70,73.65 72,73.65 74,73.65 76,73.65 42,74.1 42,76.1 42,78.1 44,78.65 46,78.65 48,78.65 50,78.65 52,78.65 54,78.65 56,78.65 58,78.65 60,78.65
NetC8_2: C8.2 U1.8 Y1.1 | length 7.5
  BL w0.254: C8.2 52.7,43.8 Y1.1 52.4,44.238 52.438,44.238 53.327,45.127 54.619,45.127 54.927,44.819 55.098,44.648 57.647,44.648 U1.8
NetC10_2: C10.2 U1.10 Y1.3 | length 6.1
  BL w0.254: C10.2@53.701,47.749 53.701,46.599 Y1.3 54.45,46.75 56.904,46.75 57.621,46.033 57.621,45.673 57.644,45.65 U1.10
NetC11_2: C11.2 U1.5 | length 1.9
  BL w0.254: C11.2 57.65,42.15 58.1,42.6 U1.5
NetD1_1: D1.1 Q1.1 Q2.3 R6.1 | length 11.8
  BL w0.254: D1.1 18.5,24.05 18.104,23.654 18.062,23.654 16.3,21.892 Q2.3 16.3,17.8 17.8,16.3 Q1.1 R6.1@20.05,16.3
NetD1_2: D1.2 U2.14 | length 91
  TL w0.254: v1(40.55,11.5) 40.562,11.512 44.023,11.512 v1(44.034,11.523)
  BL w0.254: D1.2 29.6,22.15 38.65,13.1 38.65,12.05 39.2,11.5 v1(40.55,11.5) ; v1(44.034,11.523) 44.12,11.438 44.508,11.438 44.65,11.296 101.446,11.296 102.55,12.4 U2.14
NetD1_3: D1.3 S2.3 S2.4 | length 14.6
  TL w0.254: S2.4 S2.3 16.703,27.8 17.27,27.233 17.27,24.87 v1(17.27,24.831)
  BL w0.254: D1.3 16.3,23.9 17.231,24.831 v1(17.27,24.831)
NetDS1_2: DS1.2 R2.1 | length 5.9
  TL w0.254: DS1.2 95.019,59.781 95.019,58.931 v1(95.038,58.913)
  BL w0.254: R2.1 92.1,55.975 92.987,56.862 v1(95.038,58.913)
NetDS2_2: DS2.2 R3.1 | length 8.4
  TL w0.254: v1(25,58.9) DS2.2
  BL w0.254: v1(25,58.9) 26.235,57.665 26.235,54.925 27.109,54.051 27.599,54.051 R3.1 ; R3.1@27.792,53.839 28.148,53.483 28.148,53.488 R3.1@27.796,53.841
NetDS3_2: DS3.2 R4.1 | length 8.2
  TL w0.254: v1(28.35,62.3) 28.375,62.325 28.375,63.225 DS3.2
  BL w0.254: R4.1@27.604,55.354 28,55.75 28,61.928 28.35,62.278 v1(28.35,62.3)
NetFL1_1: FL1.1 L2.1 | length 0.8
  BL w0.8: 59.999,49.301 L2.1
NetFL1_3: FL1.3 U1.13 | length 1.5
  BL w0.254: U1.13 59.699,47.575 59.924,47.8 FL1.3
NetFL1_4: FL1.4 U1.12 | length 1.7
  BL w0.254: FL1.4 58.497,47.752 58.953,47.752 59.176,47.529 59.176,47.169 59.176,46.723 U1.12
NetL3_2: L3.2 U3.5 | length 0.3
  BL w0.4: L3.2@13.575,16.875 L3.2
NetQ1_2: Q1.2 Q3.2 R6.2 | length 4.1
  BL w0.6: Q1.2 20,14.4 R6.2 ; R6.2@20.3,14.5 21.5,15.7 21.5,16.3 Q3.2
NetQ2_1: Q2.1 R7.1 U2.15 | length 94.8
  TL w0.254: v1(39.6,12.296) 44.594,12.296 v1(44.648,12.35)
  BL w0.254: R7.1 20.025,20.125 18.675,20.125 Q2.1 18.45,20.2 17.8,20.85 17.8,22.454 18.123,22.777 29.615,22.777 39.6,12.792 v1(39.6,12.296) ; v1(44.648,12.35) 45.249,11.75 100.54,11.75 101.75,12.96 U2.15
NetR1_2: R1.2 U1.17 | length 1.2
  BL w0.254: U1.17 61.772,45.173 62.218,45.173 62.36,45.173 62.419,45.233 62.677,45.233 62.749,45.305 R1.2@62.749,45.4
NetR8_1: R8.1 U2.7 | length 97.8
  TL w0.254: v1@109.4,13.75 109.45,13.8 v1(109.45,16.2)
  BL w0.254: R8.1 22.173,12.65 25.377,9.446 105.339,9.446 108.293,12.4 v1(109.45,13.557) ; U2.7 108.02,16.22 109.43,16.22 v1(109.45,16.2)
NetS1_3: S1.3 S1.4 U2.18 | length 26.7
  TL w0.254: S1.4 103.5,27.75 103.55,27.8 v1(107.45,27.8) 112.45,27.8 112.5,27.75 S1.3
  BL w0.254: U2.18 99.61,16.35 100.272,16.35 100.45,16.528 100.45,18.97 102.78,21.3 106.75,21.3 107.45,22 v1(107.45,27.8)
NetSW1_S4: SW1.S4 U2.13 | length 113
  TL w0.254: v1(29.2,27.75) 29.2,26 v1@29.25,25.95
  BL w0.254: SW1.S4 18.325,43.175 25.85,35.65 25.85,31.926 29.2,28.576 v1@29.2,27.658 ; v1(29.2,25.95) 29.2,25.4 43.758,10.842 102.142,10.842 103.35,12.05 U2.13
NetSW1_X2: SW1.X2 U2.11 | length 97.8
  TL w0.254: v1@27.625,27.875 27.662,27.837 27.662,26.037 v1(27.7,26)
  BL w0.254: SW1.X2 23.29,31.6 24.658,31.6 27.619,28.639 27.619,27.931 v1(27.675,27.875) ; v1(27.7,26) 27.697,25.997 27.697,25.241 28.178,24.76 28.49,24.76 43.35,9.9 44.565,9.9 102.484,9.9 104.95,12.366 U2.11
NetSW1_Y2: SW1.Y2 U2.12 | length 113.2
  TL w0.254: v1(28.45,28.369) 28.45,25.446 v1(28.459,25.437)
  BL w0.254: SW1.Y2 17.3,43.55 25.396,35.454 25.396,31.504 28.45,28.45 v1(28.45,28.369) ; v1(28.459,25.437) 28.459,25.433 43.504,10.388 102.33,10.388 104.15,12.208 U2.12
NetSW2_S4: SW2.S4 U2.10 | length 51.9
  BL w0.254: SW2.S4 95.33,51.17 102.45,44.05 104.192,44.05 112.712,35.53 112.712,17.128 110.184,14.6 109.442,14.6 107.792,12.95 106,12.95 105.792,13.158 105.792,13.948 U2.10
NetSW2_X2: SW2.X2 U2.8 | length 34.5
  BL w0.254: SW2.X2 100.01,34.9 109.35,34.9 111.804,32.446 111.804,17.504 109.808,15.508 108.068,15.508 U2.8
NetSW2_Y2: SW2.Y2 U2.9 | length 52.4
  BL w0.254: SW2.Y2 104.05,43.55 112.258,35.342 112.258,17.316 109.996,15.054 109.254,15.054 108.19,13.99 U2.9
NetU1_1: U1.1 U2.26 | length 51.6
  BL w0.254: U1.1 60.699,41.201 73.064,28.836 74.994,28.836 75.408,29.25 96.75,29.25 97.2,28.8 101.75,24.25 U2.26
NetU1_2: U1.2 U2.27 | length 53.3
  TL w0.254: v1(71,29.427) 71.011,29.439 74.639,29.439 v1(74.714,29.513)
  BL w0.254: U1.2 60.199,41.059 71,30.258 v1(71,29.427) ; v1(74.714,29.513) 74.885,29.513 75.122,29.75 96.893,29.75 97.193,29.45 97.2,29.45 102.55,24.1 U2.27
NetU1_3: U1.3 U2.6 | length 73.6
  TL w0.254: v1(68.7,31.6) 68.725,31.625 71.902,31.625 v1(71.95,31.577)
  BL w0.254: U1.3 59.699,40.601 v1(68.7,31.6) ; v1(71.95,31.577) 72.023,31.65 109,31.65 111.35,29.3 111.35,17.692 110.698,17.04 U2.6
NetU1_6: U1.6 U2.30 | length 62.1
  TL w0.254: v1(69.35,30.9) 72.6,30.9 v1(72.65,30.95)
  BL w0.254: U1.6 56.793,43.65 56.531,43.388 56.531,38.561 57.442,37.65 61.85,37.65 68.023,31.477 68.023,31.32 68.443,30.9 v1(69.35,30.9) ; v1(72.65,30.95) 72.885,31.185 97.391,31.185 104.827,23.749 104.827,22.613 U2.30
NetU1_7: U1.7 U2.29 | length 63
  TL w0.254: v1(69.938,30.211) 73.261,30.211 v1(73.4,30.35)
  BL w0.254: U1.7 56.454,44.15 56.077,43.773 56.077,38.373 57.3,37.15 61.5,37.15 68.439,30.211 v1(69.938,30.211) ; v1(73.4,30.35) 73.801,30.35 74.182,30.731 97.203,30.731 104.15,23.784 U2.29
NetU1_20: U1.20 U2.28 | length 53.4
  BL w0.254: U1.20 61.749,40.82 72.897,29.673 73.766,29.673 74.37,30.277 97.015,30.277 103.35,23.942 U2.28
NRST: C14.1 J2.3 R5.1 U2.4 | length 25.9
  TL w0.254: v1(96.7,17.4) 101.1,17.4 v1(101.15,17.45)
  BL w0.254: J2.3@92.576,21.116 92.066,21.116 91.55,20.6 91.55,14.8 91.743,14.607 92.343,14.607 R5.1 94.75,14.5 94.959,14.709 94.959,15.659 v1(96.7,17.4) ; v1(101.15,17.45) 102.345,18.645 107.995,18.645 U2.4
PWR_LED: R3.2 U2.21 | length 88.8
  TL w0.254: v1(98.1,19.4) v1(98.1,21.75)
  BL w0.254: R3.2 29.45,53.8 31.051,53.8 33.651,51.2 36.65,51.2 53.854,33.996 63.154,33.996 69.25,27.9 88.706,27.9 89.187,27.419 90.455,27.419 90.732,27.696 96.362,27.696 98.1,25.958 v1(98.1,21.75) ; v1(98.1,19.4) 98.737,18.763 99.377,18.763 U2.21
SPARE_LED: R2.2 U2.25 | length 44.8
  TL w0.254: v1(89.9,28.55) v1(89.9,32.55)
  BL w0.254: v1@89.8,28.55 v1(89.9,28.55) 90.021,28.55 90.267,28.796 96.562,28.796 100.95,24.408 U2.25 ; v1(89.9,32.55) 89.9,33.45 86.273,37.077 86.273,49.273 90.5,53.5 R2.2
SWCLK: J2.4 U2.24 | length 5.6
  BL w0.254: J2.4 95.014,21.22 95.194,21.04 96.59,21.04 U2.24
SWDIO: J2.2 U2.23 | length 5.7
  BL w0.254: J2.2 95.054,19.95 95.344,20.24 U2.23
UART1_RX: J1.4 U2.20 | length 37.2
  TL w0.254: v1(95.5,8.65) 95.5,14.1 v1(95.55,14.15)
  BL w0.254: v1(95.5,8.65) 95.55,8.7 109.13,8.7 J1.4 ; v1(95.55,14.15) 95.551,15.073 98.318,17.84 U2.20
UART1_TX: J1.5 U2.19 | length 35
  TL w0.254: v1(96.385,14.95) 96.385,8.088 v1(96.45,8.023)
  BL w0.254: v1(96.385,14.95) 96.385,15.099 98.327,17.04 U2.19 ; v1@96.535,7.938 v1(96.45,8.023) 109.173,8.023 115.78,14.63 J1.5
V_RF: C3.2 C4.2 C5.2 C6.2 L1.2 U1.9 U1.11 U1.14 U1.15 | length 11.3
  TL w0.4: v1(56.425,46.05) 57.562,46.05 58.012,46.5 61.219,46.5 61.419,46.7 v1(61.5,46.7) ; v1@56.45,46.125 v1@56.45,47.65
  BL w0.254: v1@56.375,46.05 v1@56.438,45.988 ; C4.2@56.438,45.362 C4.2 ; C4.2@56.599,45.15 U1.9 ; C3.2@57.275,47.7 57.447,47.527 C3.2@57.447,47.525 ; U1.11@58.676,46.75 58.676,46.723 U1.11
  BL w0.4: v1@56.4,47.7 v1(56.45,47.7) C3.2@57.275,47.7 ; C4.2@56.438,45.362 v1@56.438,45.988 ; C3.2@57.447,47.525 57.471,47.525 58.021,46.975 U1.11@58.649,46.975
VBAT: C15.2 L3.1 Q1.3 R8.2 U3.1 U3.6 | length 5
  BL w0.254: U3.1 U3.6 ; 15.45,14.55 15.45,13.85 16.379,12.921 16.729,12.921 R8.2
pads on no net: BT1.3 BT1.4 BT1.5 BT1.6 J1.2 J1.3 J1.6 J2. J2.6 MH1. MH2. MH3. MH4. MH5. MH6. SW1.S2 SW1.S3 SW2.S2 SW2.S3 U2.2 U2.3

## Polygon pours and split planes (outlines as drawn)
GND on BL "GND_L02_P012" (solid, pour order 12): 60.993,54.63 60.993,49.143 60.6,48.75 59.35,48.75 58.993,49.107 58.993,54.63 58.465,54.63 33.392,54.63 25.593,62.43 17.443,62.43 -0.007,44.98 -0.007,9.98 9.993,-0.02 24.993,-0.02 29.993,4.98 89.993,4.98 94.993,-0.02 109.993,-0.02 119.993,9.98 119.993,44.98 102.493,62.48 102.443,62.43 94.593,62.43 86.793,54.63
3V3 on BL "3V3_L02_P005" (solid, pour order 5): 12.2,17.35 12.733,17.921 12.733,21.26 12.593,21.4 11.383,21.4 11.233,21.25 11.233,17.432 11.315,17.35
NetL3_2 on BL "NETL3_2_L02_P000" (solid, pour order 0): 12.807,17.593 13.332,17.593 13.332,16.618 11.307,16.618 11.307,17.068 12.282,17.068
VBAT on BL "VBAT_L02_P004" (solid, pour order 4): 11.2,16.2 11.4,16.4 12.25,16.4 12.95,15.7 16.8,15.7 16.8,15.05 15.8,14.05 11.4,14.05 11.2,14.25
V_RF on BL "V_RF_L02_P009" (solid, pour order 9): 61,46.2 63.35,46.2 64.35,47.2 64.35,47.9 64.2,48.05 61.4,48.05 60.55,47.2 60.05,47.2 60.05,46.2
GND on TL "GND_L01_P010" (solid, pour order 10): 58.472,54.65 33.4,54.65 25.6,62.45 17.45,62.45 0,45 0,10 10,0 25,0 30,5 90,5 95,0 110,0 120,10 120,45 102.5,62.5 102.45,62.45 94.6,62.45 86.8,54.65

## Keep-outs
Keep-Out Layer:
  the board outline again, w0.254

## Silkscreen, mask and mechanical layers (free items; w line width, h text height)
Top Overlay:
  text "Link" at 30.25,63 h2
  text "Ready" at 83.8,59.766 h2
  text "Power" at 26.65,59.3 h2
  text "Fire" at 104.8,19.45 h2
  text "On" at 10.5,19.35 h2
  text "Lambo" at 31.654,10.754 h1.52
  text "A7V Remote 1.0" at 31.554,8.004 h1.52
Bottom Overlay:
  text "G" at 115.7,23.9 h1.52
  text "RX" at 115.796,16.304 h1.52
  text "TX" at 115.8,13.66 h1.52
  text "2x Alkaline AA" at 25.896,10.054 h1.52
  text "0.9-3.3V Input" at 25.896,7.862 h1.52
MechOutline (Mech31):
  the board outline again, w0.254

## Text inside footprints (layer, text, board x,y; h text height)
BT1: Bottom Overlay "+" at 28.046,10.9 h1.52; Bottom Overlay "-" at 28.146,19.892 h1.52